# Altium PCB Spiritfarer.PcbDoc
Units mil, origin at the board's own origin, x right, y up, seen from the top; angles counter-clockwise.
Board outline 3370.39 x 2125.39 mil, 2 copper layers (Top Layer, Bottom Layer); 16 components, 0 nets, 0 pads, 1 vias.
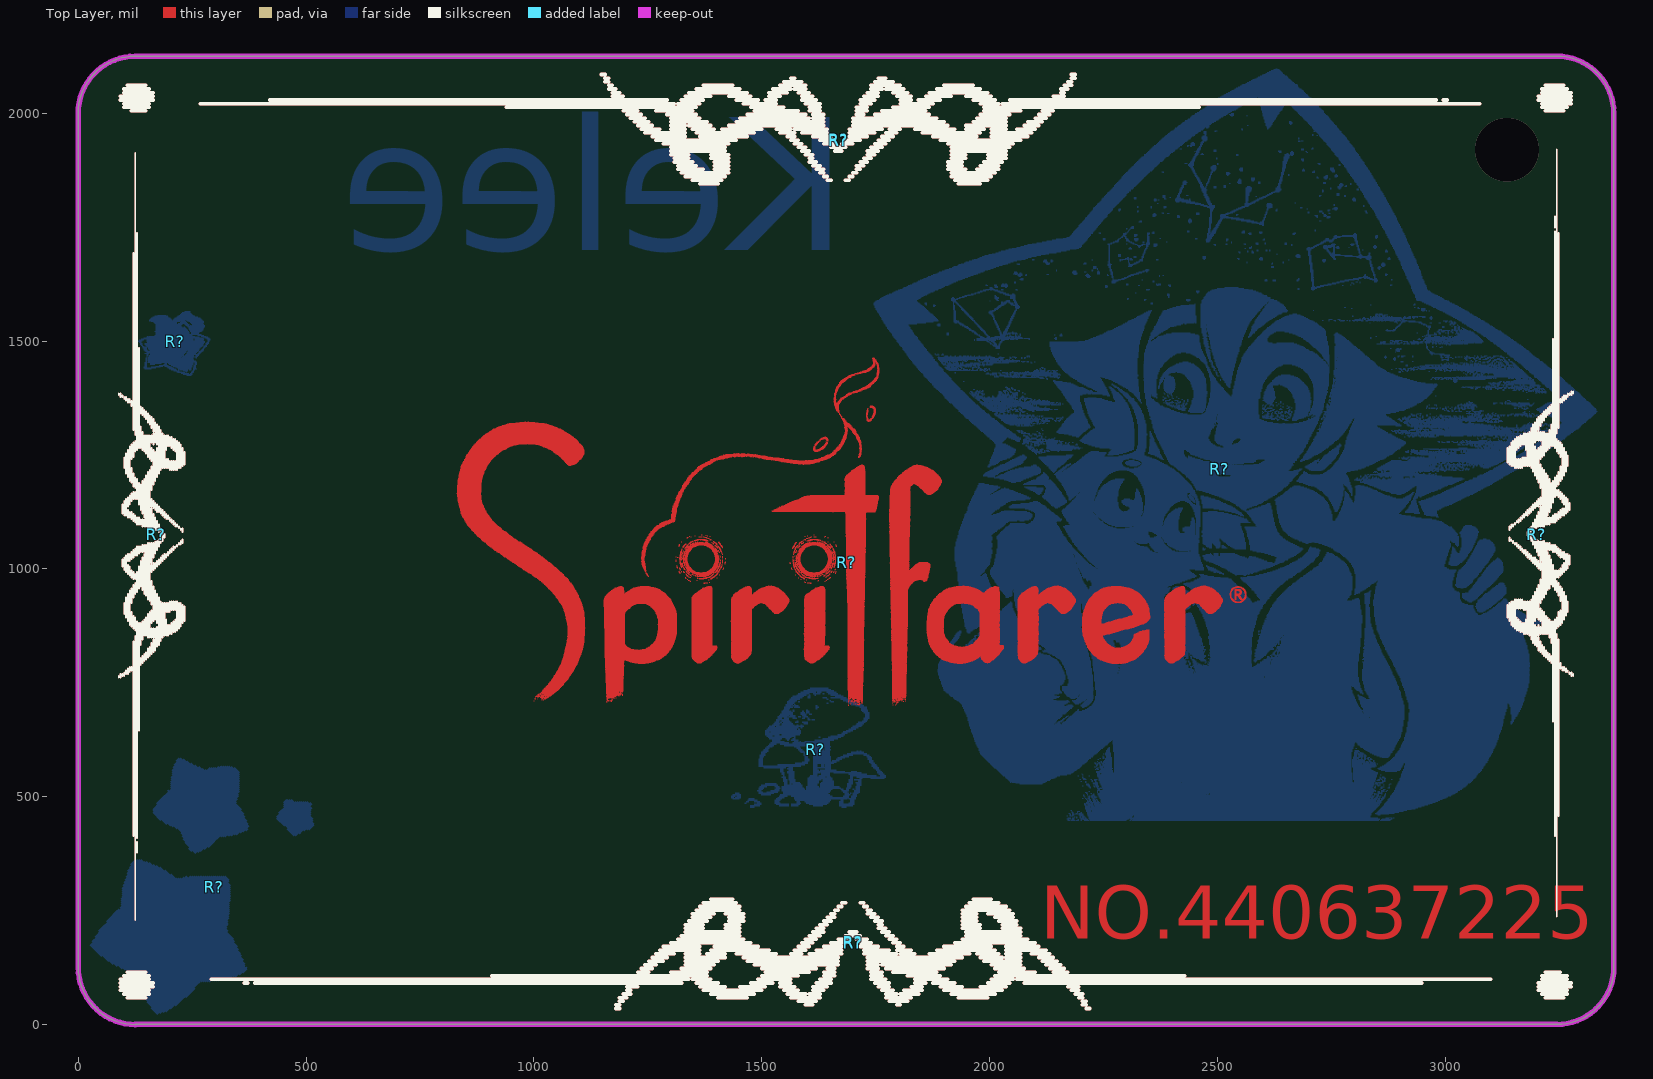
[diagram p0: Top Layer view]
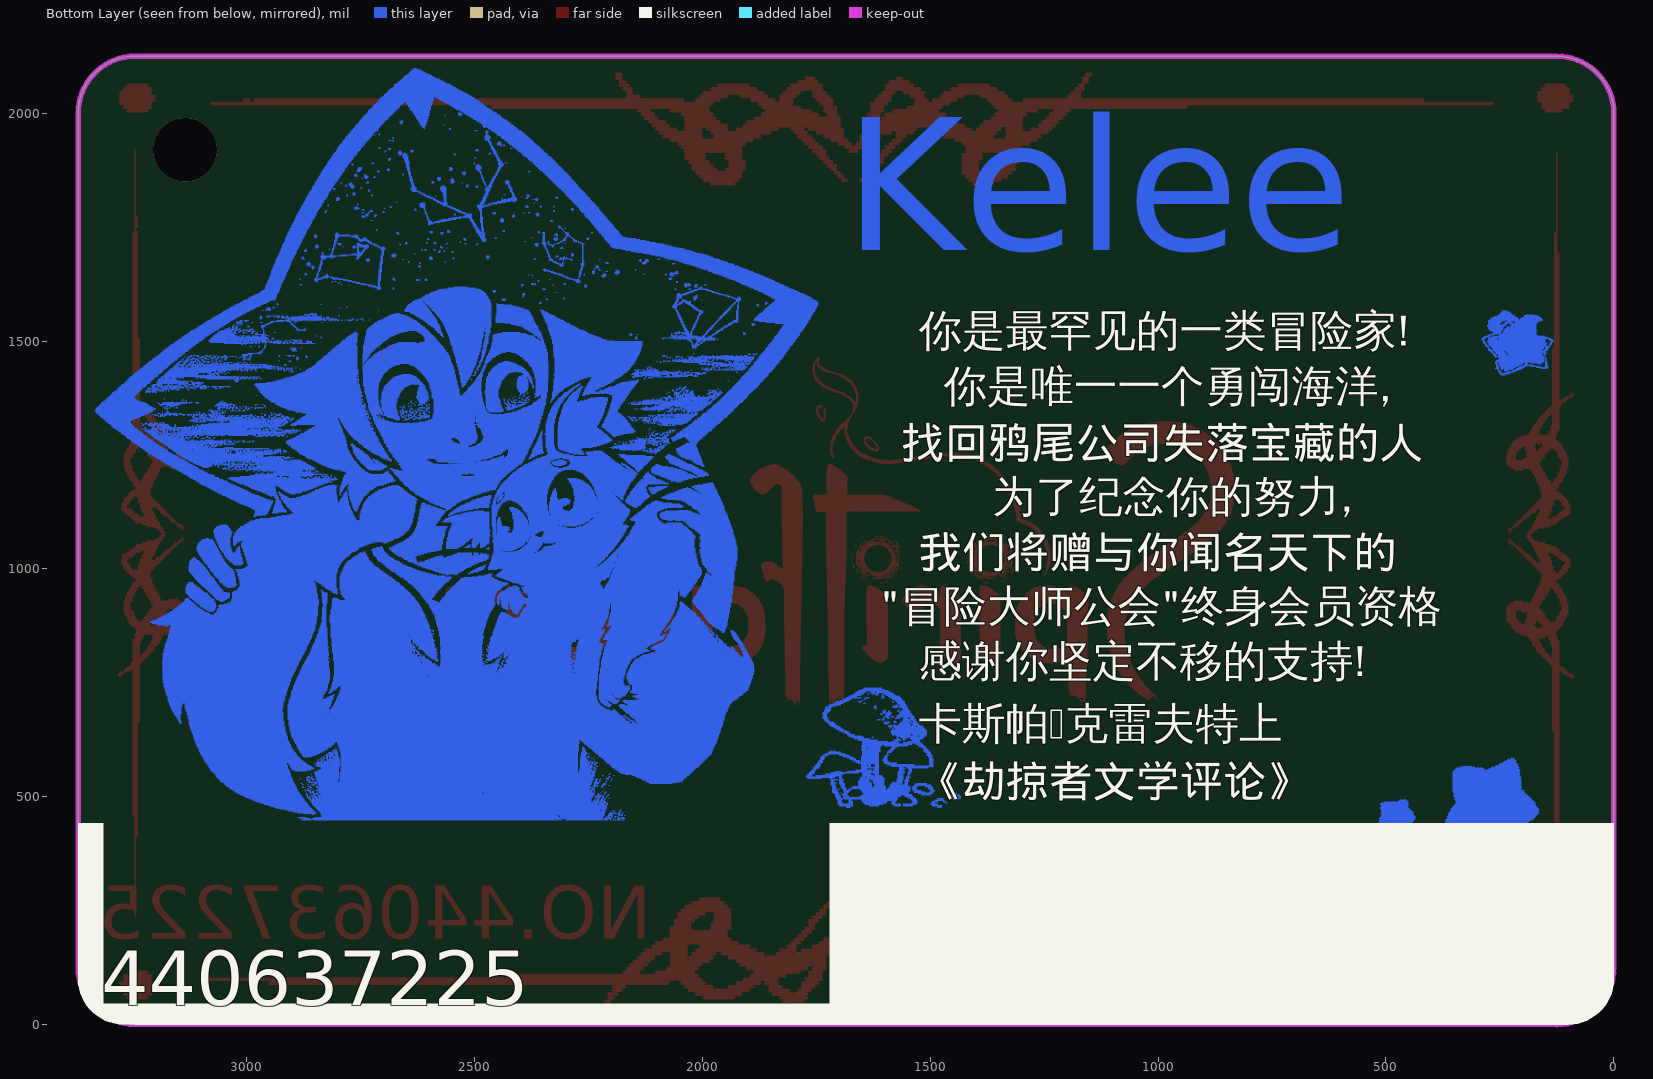
[diagram p1: Bottom Layer view, seen from below]

## Layer stack, top to bottom
Top Solder: solder mask 0.4, Solder Resist, Dk 3.5
Top Layer: signal copper 1.4
Dielectric 1: dielectric 12.6, FR-4, Dk 4.8
Bottom Layer: signal copper 1.4
Bottom Solder: solder mask 0.4, Solder Resist, Dk 3.5

## Board outline
0,125 0,2000 -0.2,1999.8 cw(c125,1999.8) 125,2125 3245,2125 3244.8,2125.2 cw(c3244.8,2000) 3370,2000 3370,125 3370.2,125.2 cw(c3245,125.2) 3245,0 125.2,0 125.2,-0.2 cw(c125.2,125)

## Design rules (kind name [scope] priority, off if disabled: settings)
AssemblyTestPointUsage [All] p1 off:
AssemblyTestpoint [All] p1 off: testpointundercomponent=TRUE minsize=40 maxsize=100 preferedsize=60 minholesize=0 maxholesize=40 preferedholesize=32 testpointgrid=1 usegrid=TRUE gridtolerance=0.01 allowsidetop=TRUE allowsidebottom=TRUE
Clearance [All] p1 off: gap=10 ignorepadtopadclearanceinfootprint=FALSE except(0: Arc-Hole Track-Hole SMDPad-Hole THPad-Hole Via-Hole Fill-Hole Poly-Hole Region-Hole Text-Hole)
ComponentClearance [All] p1 off: gap=10 collisioncheckmode=3 verticalgap=10 showdistances=FALSE
DiffPairsRouting [All] p1 off: maxlimit=10 minlimit=10 mostfreqgap=10 toplayer_minwidth=15 toplayer_maxwidth=15 toplayer_prefwidth=15 bottomlayer_minwidth=15 bottomlayer_maxwidth=15 bottomlayer_prefwidth=15 maxuncoupledlength=500
FabricationTestPointUsage [All] p1 off: valid=0 allowmultiple=FALSE
FabricationTestpoint [All] p1 off: side=3 testpointundercomponent=TRUE minsize=40 maxsize=100 preferedsize=60 minholesize=0 maxholesize=40 preferedholesize=32 testpointgrid=1 allowsidetop=TRUE allowsidebottom=TRUE usegrid=TRUE gridtolerance=0.01
FanoutControl Fanout_BGA [IsBGA] p1 off: bgadir=Out bgaviamode=Centered fanoutstyle=Auto fanoutdirection=Alternating viagrid=1 // Fanout_BGA (Default Rule)
FanoutControl Fanout_LCC [IsLCC] p2 off: bgadir=Out bgaviamode=Centered fanoutstyle=Auto fanoutdirection=Alternating viagrid=1 // Fanout_LCC (Default Rule)
FanoutControl Fanout_SOIC [IsSOIC] p3 off: bgadir=Out bgaviamode=Centered fanoutstyle=Auto fanoutdirection=Alternating viagrid=1 // Fanout_SOIC (Default Rule)
FanoutControl Fanout_Small [(CompPinCount < 5)] p4 off: bgadir=Out bgaviamode=Centered fanoutstyle=Auto fanoutdirection=OutThenIn viagrid=1 // Fanout_Small (Default Rule)
FanoutControl Fanout_Default [All] p5 off: bgadir=Out bgaviamode=Centered fanoutstyle=Auto fanoutdirection=Alternating viagrid=1 // Fanout_Default (Default Rule)
Height [All] p1 off: minheight=0 maxheight=1000 prefheight=500
HoleSize [All] p1 off: absolutevalues=TRUE maxlimit=100 minlimit=1 maxpercent=80.000 minpercent=20.000
HoleToHoleClearance [All] p1 off: gap=10 allowstackedmicrovias=TRUE
LayerPairs [All] p1 off: enforce=TRUE
MinimumSolderMaskSliver [All] p1 off: minsoldermaskwidth=10
NetAntennae [All] p1 off: netantennaetolerance=0
PasteMaskExpansion [All] p1 off: expansion=0
PlaneClearance [All] p1 off: clearance=20
PlaneConnect [All] p1 off: planeconnectstyle=Relief reliefexpansion=20 reliefentries=4 reliefconductorwidth=10 reliefairgap=10
PolygonConnect [All] p1 off: connectstyle=Relief reliefconductorwidth=10 reliefentries=4 polygonreliefangle="90 Angle" airgapwidth=10
RoutingCorners [All] p1 off: cornerstyle=45-Degree minsetback=100 maxsetback=100
RoutingLayers [All] p1 off: top layer_v5=TRUE bottom layer_v5=TRUE
RoutingPriority [All] p1 off: routingpriority=0
RoutingTopology [All] p1 off: topology=Shortest
RoutingVias [All] p1 off: holewidth=28 width=50 viastyle="Through Hole" minholewidth=28 minwidth=50 maxholewidth=28 maxwidth=50
ShortCircuit [All] p1 off: allowed=FALSE
SilkToSilkClearance [All] p1 off: silktosilkclearance=10
SilkToSolderMaskClearance [IsPad] p1 off: minsilkscreentomaskgap=10 clearancetoexposedcopper=TRUE
SolderMaskExpansion [All] p1 off: expansion=4 istentingtop=FALSE
UnRoutedNet [All] p1 off:
UnpouredPolygon [All] p1 off:
Width [All] p1 off: maxlimit=10 minlimit=10 preferedwidth=10
1 further rules are at their usual default settings.

## Components (designator, comment, footprint, x,y, rotation, side; value= is the part's Value field where it differs from the comment)
R? "Comment" Mushroom_BL 1617,603 r0 top
R? "Comment" STARS_BS 297,301 r0 top
R? "Comment" STARS_BL 297,301 r0 top
R? "Comment" Witchhat_BL 212,1498 r0 top
R? "Comment" "profile photo_BS" 2504,1219 r0 top
R? "Comment" "profile photo_BL" 2504,1219 r0 top
R? "Comment" pattern1_TL 3200,1075 r270 top
R? "Comment" pattern1_TL 170,1075 r90 top
R? "Comment" pattern1_TO 3200,1075 r270 top
R? "Comment" pattern1_TO 170,1075 r90 top
R? "Comment" Spiritfarer_LOGO_TS 1686,1013 r0 top
R? "Comment" Spiritfarer_LOGO_TL 1686,1013 r0 top
R? "Comment" pattern0_TL 1700,178 r180 top
R? "Comment" pattern0_TL 1668,1942 r0 top
R? "Comment" pattern0_TO 1668,1940 r0 top
R? "Comment" pattern0_TO 1700,180 r180 top

## Footprints (in the part's own frame and the unit in brackets; to place one, negate y for a bottom-side part, rotate by r counter-clockwise, add the part's x,y. Pads: shape width x height; smd on the part's side, far side on the other; paste and mask are expansions set on the pad)
Mushroom_BL [mil]
  Bottom Layer lines w3: -184,-105 -178,-105 ; -184,-102 -175,-102 ; -181,-108 -166,-108 ; -181,-99 -163,-99 ; -175,-105 -163,-105 ; -175,-96 -166,-96 ; -172,-102 -163,-102 ; -154,-117 -151,-117 ; -151,-114 -145,-114 ; -148,-111 -127,-111 ; -145,-108 -133,-108 ; -142,-126 -133,-126 ; -142,-123 -121,-123 ; -133,-120 -118,-120 ; -133,-114 -121,-114 ; -127,-117 -118,-117 ; -127,-90 -118,-90 ; -124,-96 -91,-96 ; -124,-93 -115,-93 ; -124,-87 -115,-87 ; -124,-84 -112,-84 ; -124,-36 -31,-36 ; -124,-33 -115,-33 ; -124,-30 -115,-30 ; -124,-27 -115,-27 ; -124,-24 -115,-24 ; -124,-21 -115,-21 ; -121,-81 -106,-81 ; -121,-18 -115,-18 ; -121,-15 -112,-15 ; -121,-12 -109,-12 ; -118,-99 -97,-99 ; -118,-78 -82,-78 ; -118,-9 -109,-9 ; -118,-6 -106,-6 ; -115,-3 -103,-3 ; -112,-39 -64,-39 ; -112,0 -103,0 ; -109,-75 -85,-75 ; -109,3 -100,3 ; -109,33 -79,33 ; -109,36 -31,36 ; -109,39 -100,39 ; -109,42 -31,42 ; -106,-93 -82,-93 ; -106,6 -94,6 ; -106,30 -94,30 ; -106,45 -40,45 ; -103,9 -91,9 ; -103,27 -52,27 ; -103,48 -37,48 ; -100,12 -85,12 ; -100,24 -73,24 ; -100,51 -88,51 ; -97,-90 -79,-90 ; -97,15 -58,15 ; -97,39 -31,39 ; -94,18 -67,18 ; -94,21 -76,21 ; -94,54 -79,54 ; -91,57 -76,57 ; -88,-117 -76,-117 ; -88,-114 -79,-114 ; -88,-111 -76,-111 ; -88,-87 -79,-87 ; -88,-81 -79,-81 ; -88,30 -43,30 ; -88,60 -79,60 ; -85,-120 -58,-120 ; -85,-108 -73,-108 ; -85,-84 -76,-84 ; -85,51 -25,51 ; -85,63 -79,63 ; -85,66 -58,66 ; -82,-105 -67,-105 ; -82,-33 -22,-33 ; -82,69 -73,69 ; -82,72 -61,72 ; -79,-123 -58,-123 ; -79,-102 -61,-102 ; -79,75 -58,75 ; -76,-99 32,-99 ; -76,-48 -70,-48 ; -76,-45 -70,-45 ; -76,-42 -70,-42 ; -76,12 32,12 ; -76,60 -73,60 ; -76,78 -49,78 ; -73,-90 35,-90 ; -73,-87 -22,-87 ; -73,-84 -25,-84 ; -73,-81 -28,-81 ; -73,-60 -64,-60 ; -73,-54 -67,-54 ; -73,-51 -67,-51 ; -73,33 -34,33 ; -73,54 -46,54 ; -73,57 -49,57 ; -73,63 -55,63 ; -73,81 -49,81 ; -73,84 -52,84 ; -70,-96 29,-96 ; -70,-93 32,-93 ; -70,-69 -61,-69 ; -70,-66 -61,-66 ; -70,-63 -64,-63 ; -70,-57 -67,-57 ; -70,60 -52,60 ; -70,87 -58,87 ; -67,-78 -28,-78 ; -67,-75 -61,-75 ; -67,-72 -61,-72 ; -67,9 -16,9 ; -67,69 -58,69 ; -67,90 -55,90 ; -67,93 -49,93 ; -64,24 -55,24 ; -64,96 -52,96 ; -64,99 -49,99 ; -61,-51 -46,-51 ; -61,-48 -46,-48 ; -61,-42 -49,-42 ; -61,21 -58,21 ; -61,102 -46,102 ; -61,105 -43,105 ; -58,-66 -43,-66 ; -58,-63 -46,-63 ; -58,-60 -46,-60 ; -58,-57 -46,-57 ; -58,-54 -46,-54 ; -58,-45 -49,-45 ; -58,-39 -49,-39 ; -58,72 -43,72 ; -58,108 -40,108 ; -55,-75 -52,-75 ; -55,-72 -34,-72 ; -55,-69 -43,-69 ; -55,75 -43,75 ; -55,111 -34,111 ; -52,-123 -37,-123 ; -52,-120 -34,-120 ; -52,-102 38,-102 ; -52,21 -37,21 ; -52,114 -28,114 ; -49,-75 -31,-75 ; -49,15 32,15 ; -49,24 -43,24 ; -49,69 -40,69 ; -49,84 -46,84 ; -49,87 -46,87 ; -49,96 -46,96 ; -49,117 -25,117 ; -46,-108 71,-108 ; -46,-105 74,-105 ; -46,6 -34,6 ; -46,18 -37,18 ; -46,27 -43,27 ; -46,93 -34,93 ; -46,99 -43,99 ; -43,-111 35,-111 ; -43,-30 -16,-30 ; -43,60 -37,60 ; -43,96 -37,96 ; -40,-117 -31,-117 ; -40,-114 -34,-114 ; -40,3 -31,3 ; -40,54 -37,54 ; -40,63 -37,63 ; -40,120 -19,120 ; -37,0 -28,0 ; -37,45 -34,45 ; -37,72 -31,72 ; -37,105 -34,105 ; -37,123 -13,123 ; -34,-3 -25,-3 ; -34,18 -31,18 ; -31,-6 -22,-6 ; -31,48 -28,48 ; -31,54 -28,54 ; -31,78 -19,78 ; -31,81 -22,81 ; -31,126 2,126 ; -28,-27 -16,-27 ; -28,60 -16,60 ; -28,69 -22,69 ; -28,75 -19,75 ; -28,84 -25,84 ; -25,-12 -19,-12 ; -25,-9 -22,-9 ; -25,57 -16,57 ; -25,72 -16,72 ; -25,129 41,129 ; -22,-114 32,-114 ; -22,-24 -13,-24 ; -22,-21 -13,-21 ; -22,-18 -16,-18 ; -22,-15 -16,-15 ; -22,18 32,18 ; -19,-117 29,-117 ; -19,-87 38,-87 ; -19,-84 56,-84 ; -19,-81 8,-81 ; -19,81 -13,81 ; -19,84 -13,84 ; -19,87 -16,87 ; -16,-78 5,-78 ; -16,-75 5,-75 ; -16,-72 8,-72 ; -16,-69 8,-69 ; -16,-66 14,-66 ; -16,-63 38,-63 ; -16,66 -10,66 ; -16,69 -13,69 ; -16,114 -10,114 ; -16,117 -10,117 ; -16,132 35,132 ; -13,-120 26,-120 ; -13,-60 23,-60 ; -13,78 -7,78 ; -13,120 -10,120 ; -10,-57 5,-57 ; -10,9 32,9 ; -10,135 29,135 ; -7,-3 32,-3 ; -7,0 20,0 ; -7,3 20,3 ; -7,6 35,6 ; -7,66 -1,66 ; -4,-123 17,-123 ; -4,-54 5,-54 ; -4,-51 11,-51 ; -4,-48 65,-48 ; -4,-45 8,-45 ; -4,-42 5,-42 ; -4,-39 35,-39 ; -4,-36 5,-36 ; -4,-33 5,-33 ; -4,-30 41,-30 ; -4,-27 47,-27 ; -4,-24 35,-24 ; -4,-21 35,-21 ; -4,-18 35,-18 ; -4,-15 35,-15 ; -4,-12 32,-12 ; -4,-9 32,-9 ; -4,-6 32,-6 ; -4,123 11,123 ; -1,21 41,21 ; -1,120 2,120 ; 2,90 5,90 ; 2,93 8,93 ; 2,96 5,96 ; 5,126 14,126 ; 8,-57 32,-57 ; 8,27 11,27 ; 11,-81 53,-81 ; 11,-78 41,-78 ; 11,-75 41,-75 ; 11,-45 47,-45 ; 14,-72 41,-72 ; 14,-54 32,-54 ; 14,-51 32,-51 ; 14,-36 20,-36 ; 14,-33 20,-33 ; 17,-69 41,-69 ; 17,-66 38,-66 ; 17,24 50,24 ; 17,114 26,114 ; 17,123 20,123 ; 23,-42 35,-42 ; 23,-36 35,-36 ; 23,-33 35,-33 ; 23,0 35,0 ; 23,3 32,3 ; 26,-60 35,-60 ; 26,102 29,102 ; 26,111 29,111 ; 26,126 47,126 ; 29,27 56,27 ; 29,123 50,123 ; 32,108 35,108 ; 35,30 62,30 ; 35,105 41,105 ; 35,114 68,114 ; 35,120 56,120 ; 38,-24 53,-24 ; 41,-51 101,-51 ; 44,117 62,117 ; 47,-21 59,-21 ; 50,-18 65,-18 ; 50,33 65,33 ; 53,-123 83,-123 ; 53,-120 86,-120 ; 53,-117 62,-117 ; 53,-114 62,-114 ; 56,-111 62,-111 ; 56,-87 62,-87 ; 56,-15 74,-15 ; 56,111 74,111 ; 59,-126 68,-126 ; 59,-90 74,-90 ; 59,36 71,36 ; 62,-102 74,-102 ; 62,-93 71,-93 ; 62,-12 83,-12 ; 62,39 77,39 ; 62,108 80,108 ; 65,-99 77,-99 ; 65,-96 74,-96 ; 68,-87 74,-87 ; 68,-84 77,-84 ; 68,42 83,42 ; 68,105 89,105 ; 71,-81 80,-81 ; 71,-78 80,-78 ; 71,-75 83,-75 ; 71,-9 113,-9 ; 74,-117 86,-117 ; 74,-108 89,-108 ; 74,-72 83,-72 ; 74,-69 83,-69 ; 74,-66 83,-66 ; 74,-54 113,-54 ; 74,45 89,45 ; 74,102 95,102 ; 77,-114 86,-114 ; 77,-111 86,-111 ; 77,-96 80,-96 ; 77,-63 83,-63 ; 77,-60 83,-60 ; 77,-57 134,-57 ; 80,-105 89,-105 ; 80,-102 92,-102 ; 80,-48 92,-48 ; 80,-6 107,-6 ; 80,48 95,48 ; 80,99 104,99 ; 83,-99 92,-99 ; 83,-96 95,-96 ; 83,-87 86,-87 ; 83,51 101,51 ; 86,-93 98,-93 ; 86,-90 98,-90 ; 86,-66 101,-66 ; 89,-87 98,-87 ; 89,-84 98,-84 ; 89,-81 98,-81 ; 89,-72 101,-72 ; 89,54 104,54 ; 89,96 107,96 ; 92,-78 101,-78 ; 92,-75 101,-75 ; 92,-60 155,-60 ; 92,-3 95,-3 ; 92,57 107,57 ; 95,-69 101,-69 ; 95,60 110,60 ; 98,-63 104,-63 ; 98,-3 101,-3 ; 98,93 113,93 ; 101,87 116,87 ; 101,90 113,90 ; 104,63 113,63 ; 104,84 116,84 ; 107,-12 119,-12 ; 107,66 116,66 ; 107,69 119,69 ; 107,81 119,81 ; 110,72 119,72 ; 110,75 119,75 ; 110,78 119,78 ; 113,-15 122,-15 ; 116,-21 125,-21 ; 116,-18 125,-18 ; 119,-27 128,-27 ; 119,-24 128,-24 ; 122,-63 152,-63 ; 122,-30 131,-30 ; 125,-36 137,-36 ; 125,-33 134,-33 ; 128,-39 140,-39 ; 131,-42 140,-42 ; 134,-45 143,-45 ; 137,-51 149,-51 ; 137,-48 146,-48 ; 140,-54 152,-54 ; 143,-57 155,-57
pattern0_TL [mil]
  Top Layer lines w8: 1608,103 1544,103 ; 1608,95 1536,95 ; 1608,87 1536,87 ; 1608,79 1544,79 ; 1600,111 1544,111 ; 1600,71 1544,71 ; 1592,119 1552,119 ; 1592,63 1552,63 ; 1408,79 360,79 ; 1336,87 1328,87 ; 1312,87 376,87 ; 792,71 320,71 ; 520,143 512,143 ; 520,135 512,135 ; 512,127 504,127 ; 512,119 496,119 ; 504,111 488,111 ; 496,103 488,103 ; 496,95 472,95 ; 472,63 448,63 ; 464,55 440,55 ; 456,47 432,47 ; 448,39 416,39 ; 440,31 408,31 ; 432,23 392,23 ; 424,15 336,15 ; 416,7 336,7 ; 400,63 320,63 ; 400,-1 224,-1 ; 384,-9 240,-9 ; 376,55 312,55 ; 376,-17 248,-17 ; 368,47 304,47 ; 368,39 296,39 ; 368,31 280,31 ; 368,23 336,23 ; 368,-25 248,-25 ; 368,-33 328,-33 ; 368,-41 328,-41 ; 360,-49 320,-49 ; 352,79 312,79 ; 352,-57 312,-57 ; 352,-65 304,-65 ; 344,87 296,87 ; 344,-73 248,-73 ; 336,95 280,95 ; 336,-81 248,-81 ; 328,103 200,103 ; 328,-89 256,-89 ; 320,23 280,23 ; 312,111 216,111 ; 312,15 184,15 ; 312,-97 264,-97 ; 304,7 208,7 ; 296,119 232,119 ; 280,-33 248,-33 ; 280,-41 248,-41 ; 280,-65 240,-65 ; 272,-49 240,-49 ; 272,-57 240,-57 ; 256,23 168,23 ; 248,95 192,95 ; 240,31 32,31 ; 232,39 32,39 ; 224,87 176,87 ; 216,47 32,47 ; 208,79 136,79 ; 200,71 120,71 ; 200,55 80,55 ; 192,63 96,63 ; 160,95 128,95 ; 160,87 136,87 ; 152,103 120,103 ; 144,111 104,111 ; 136,119 72,119 ; 136,23 112,23 ; 128,15 104,15 ; 120,127 80,127 ; 120,7 96,7 ; 112,-1 88,-1 ; 104,135 88,135 ; 104,-9 80,-9 ; 96,111 72,111 ; 96,23 24,23 ; 96,-17 72,-17 ; 88,103 64,103 ; 88,95 56,95 ; 88,-25 64,-25 ; 80,87 48,87 ; 80,15 24,15 ; 80,-33 64,-33 ; 72,79 48,79 ; 72,-41 56,-41 ; 64,71 40,71 ; 64,63 40,63 ; 64,7 24,7 ; 64,-49 48,-49 ; 56,55 40,55 ; 56,-57 40,-57 ; 48,-1 16,-1 ; 48,-65 40,-65 ; 40,-73 32,-73 ; 32,-9 8,-9 ; 32,-81 24,-81 ; 24,-89 16,-89 ; 16,-17 -16,-17 ; 8,-25 -8,-25 ; -8,-9 -32,-9 ; -16,7 -56,7 ; -16,-1 -40,-1 ; -16,-89 -24,-89 ; -24,23 -96,23 ; -24,15 -80,15 ; -24,-81 -32,-81 ; -32,55 -56,55 ; -32,47 -56,47 ; -32,39 -224,39 ; -32,31 -240,31 ; -32,-65 -48,-65 ; -32,-73 -40,-73 ; -40,79 -72,79 ; -40,71 -64,71 ; -40,63 -64,63 ; -40,-57 -56,-57 ; -48,87 -80,87 ; -48,-49 -64,-49 ; -56,95 -80,95 ; -56,-33 -72,-33 ; -56,-41 -64,-41 ; -64,103 -88,103 ; -64,47 -216,47 ; -64,-25 -80,-25 ; -72,119 -128,119 ; -72,111 -96,111 ; -72,55 -200,55 ; -72,-17 -88,-17 ; -80,127 -120,127 ; -80,-9 -96,-9 ; -88,63 -184,63 ; -88,-1 -104,-1 ; -96,135 -104,135 ; -96,15 -128,15 ; -96,7 -112,7 ; -104,111 -144,111 ; -104,23 -136,23 ; -112,103 -152,103 ; -120,71 -192,71 ; -128,95 -152,95 ; -136,87 -160,87 ; -136,79 -208,79 ; -168,23 -256,23 ; -176,87 -224,87 ; -184,15 -312,15 ; -192,95 -240,95 ; -200,103 -328,103 ; -200,7 -304,7 ; -216,111 -312,111 ; -224,-1 -400,-1 ; -232,119 -296,119 ; -240,-9 -384,-9 ; -240,-33 -280,-33 ; -240,-41 -280,-41 ; -240,-49 -272,-49 ; -240,-57 -272,-57 ; -240,-65 -272,-65 ; -240,-73 -344,-73 ; -248,-17 -368,-17 ; -248,-25 -368,-25 ; -248,-81 -336,-81 ; -256,-89 -320,-89 ; -264,-97 -304,-97 ; -272,23 -320,23 ; -280,95 -336,95 ; -280,31 -328,31 ; -288,39 -368,39 ; -296,87 -344,87 ; -296,-65 -352,-65 ; -304,79 -352,79 ; -304,47 -368,47 ; -312,71 -728,71 ; -312,55 -376,55 ; -312,-57 -352,-57 ; -320,63 -400,63 ; -320,-49 -360,-49 ; -328,-33 -368,-33 ; -328,-41 -360,-41 ; -336,31 -368,31 ; -336,23 -368,23 ; -336,15 -424,15 ; -336,7 -408,7 ; -360,79 -1400,79 ; -376,87 -1248,87 ; -392,23 -432,23 ; -408,31 -440,31 ; -416,39 -448,39 ; -424,47 -456,47 ; -432,55 -464,55 ; -440,63 -472,63 ; -472,95 -496,95 ; -480,103 -496,103 ; -488,111 -504,111 ; -496,119 -504,119 ; -504,135 -512,135 ; -504,127 -512,127 ; -512,143 -520,143 ; -1504,103 -1568,103 ; -1504,95 -1576,95 ; -1504,87 -1576,87 ; -1512,111 -1568,111 ; -1512,79 -1568,79 ; -1512,71 -1568,71 ; -1520,119 -1560,119 ; -1520,63 -1552,63
pattern0_TO [mil]
  silkscreen extent -1576,-95 1608,145
pattern1_TL [mil]
  Top Layer lines w4: 182,-63 154,-63 ; -158,-63 -190,-63 ; 190,-59 150,-59 ; 14,-59 6,-59 ; -10,-59 -18,-59 ; -154,-59 -194,-59 ; 198,-55 146,-55 ; 14,-55 10,-55 ; -14,-55 -22,-55 ; -150,-55 -202,-55 ; 202,-51 146,-51 ; 18,-51 14,-51 ; -18,-51 -22,-51 ; -150,-51 -206,-51 ; 206,-47 142,-47 ; 22,-47 18,-47 ; -22,-47 -26,-47 ; -146,-47 -210,-47 ; 210,-43 182,-43 ; 162,-43 142,-43 ; 26,-43 18,-43 ; -26,-43 -30,-43 ; -146,-43 -166,-43 ; -186,-43 -214,-43 ; 210,-39 186,-39 ; 162,-39 142,-39 ; 30,-39 22,-39 ; -26,-39 -34,-39 ; -146,-39 -166,-39 ; -190,-39 -214,-39 ; 214,-35 190,-35 ; 162,-35 142,-35 ; 34,-35 26,-35 ; -30,-35 -38,-35 ; -146,-35 -166,-35 ; -194,-35 -218,-35 ; 214,-31 194,-31 ; 162,-31 142,-31 ; 38,-31 30,-31 ; -34,-31 -42,-31 ; -146,-31 -170,-31 ; -198,-31 -218,-31 ; 218,-27 194,-27 ; 166,-27 146,-27 ; 42,-27 34,-27 ; -38,-27 -46,-27 ; -150,-27 -170,-27 ; -198,-27 -222,-27 ; 218,-23 186,-23 ; 166,-23 146,-23 ; 46,-23 34,-23 ; -42,-23 -50,-23 ; -150,-23 -170,-23 ; -186,-23 -222,-23 ; 218,-19 146,-19 ; 50,-19 38,-19 ; 2,-19 -6,-19 ; -42,-19 -54,-19 ; -150,-19 -222,-19 ; 222,-15 146,-15 ; 54,-15 42,-15 ; 10,-15 -14,-15 ; -46,-15 -58,-15 ; -150,-15 -226,-15 ; 230,-11 142,-11 ; 58,-11 46,-11 ; 14,-11 2,-11 ; -6,-11 -18,-11 ; -50,-11 -62,-11 ; -146,-11 -234,-11 ; 238,-7 134,-7 ; 62,-7 50,-7 ; 22,-7 6,-7 ; -10,-7 -26,-7 ; -54,-7 -66,-7 ; -138,-7 -242,-7 ; 242,-3 198,-3 ; 190,-3 126,-3 ; 66,-3 50,-3 ; 30,-3 10,-3 ; -14,-3 -34,-3 ; -58,-3 -70,-3 ; -130,-3 -194,-3 ; -202,-3 -246,-3 ; 246,1 202,1 ; 182,1 118,1 ; 70,1 54,1 ; 38,1 10,1 ; -14,1 -42,1 ; -62,1 -74,1 ; -122,1 -186,1 ; -206,1 -254,1 ; 254,5 226,5 ; 222,5 198,5 ; 186,5 110,5 ; 74,5 58,5 ; 46,5 14,5 ; -18,5 -50,5 ; -62,5 -78,5 ; -114,5 -190,5 ; -206,5 -226,5 ; -230,5 -258,5 ; 258,9 234,9 ; 218,9 202,9 ; 190,9 162,9 ; 150,9 98,9 ; 78,9 62,9 ; 58,9 14,9 ; -18,9 -62,9 ; -66,9 -82,9 ; -102,9 -154,9 ; -166,9 -194,9 ; -206,9 -226,9 ; -238,9 -262,9 ; 262,13 242,13 ; 218,13 166,13 ; 142,13 14,13 ; -18,13 -146,13 ; -170,13 -226,13 ; -246,13 -266,13 ; 266,17 246,17 ; 218,17 170,17 ; 138,17 14,17 ; -18,17 -142,17 ; -174,17 -226,17 ; -250,17 -270,17 ; 270,21 254,21 ; 218,21 178,21 ; 130,21 18,21 ; -22,21 -134,21 ; -182,21 -222,21 ; -258,21 -274,21 ; 274,25 258,25 ; 218,25 182,25 ; 122,25 38,25 ; 34,25 18,25 ; -22,25 -38,25 ; -42,25 -130,25 ; -186,25 -222,25 ; -262,25 -278,25 ; 278,29 262,29 ; 226,29 186,29 ; 118,29 46,29 ; 34,29 18,29 ; -22,29 -38,29 ; -50,29 -122,29 ; -190,29 -230,29 ; -266,29 -282,29 ; 282,33 266,33 ; 238,33 190,33 ; 110,33 54,33 ; 34,33 22,33 ; -26,33 -38,33 ; -58,33 -114,33 ; -194,33 -242,33 ; -270,33 -286,33 ; 410,37 190,37 ; 114,37 66,37 ; 38,37 22,37 ; -26,37 -42,37 ; -70,37 -118,37 ; -194,37 -430,37 ; 662,41 186,41 ; 122,41 78,41 ; 38,41 22,41 ; -26,41 -46,41 ; -82,41 -126,41 ; -190,41 -666,41 ; -674,41 -698,41 ; 838,45 218,45 ; 206,45 182,45 ; 126,45 102,45 ; 94,45 78,45 ; 42,45 26,45 ; -30,45 -46,45 ; -86,45 -98,45 ; -106,45 -130,45 ; -182,45 -210,45 ; -222,45 -846,45 ; 618,49 230,49 ; 202,49 170,49 ; 134,49 106,49 ; 94,49 78,49 ; 46,49 30,49 ; -34,49 -50,49 ; -82,49 -98,49 ; -110,49 -138,49 ; -178,49 -206,49 ; -234,49 -662,49 ; 294,53 282,53 ; 198,53 166,53 ; 146,53 114,53 ; 90,53 74,53 ; 50,53 34,53 ; -38,53 -54,53 ; -78,53 -94,53 ; -118,53 -150,53 ; -170,53 -202,53 ; -290,53 -298,53 ; 298,57 290,57 ; 194,57 118,57 ; 86,57 66,57 ; 50,57 38,57 ; -42,57 -58,57 ; -70,57 -90,57 ; -122,57 -198,57 ; -290,57 -302,57 ; 298,61 290,61 ; 186,61 126,61 ; 82,61 62,61 ; 54,61 38,61 ; -42,61 -58,61 ; -66,61 -86,61 ; -130,61 -190,61 ; -294,61 -306,61 ; 302,65 294,65 ; 178,65 134,65 ; 78,65 42,65 ; -46,65 -82,65 ; -138,65 -182,65 ; -298,65 -306,65 ; 302,69 298,69 ; 170,69 146,69 ; 74,69 42,69 ; -50,69 -78,69 ; -150,69 -174,69 ; -302,69 -310,69 ; 306,73 302,73 ; 66,73 46,73 ; -54,73 -70,73 ; -306,73 -310,73 ; 310,77 302,77 ; -306,77 -314,77 ; 310,81 306,81 ; -310,81 -314,81
pattern1_TO [mil]
  silkscreen extent -846,-63 838,81
"profile photo_BL" [mil]
  Bottom Layer drawing of 9955 lines, arcs and shapes, not listed
"profile photo_BS" [mil]
Spiritfarer_LOGO_TL [mil]
  Top Layer drawing of 6418 lines, arcs and shapes, not listed
Spiritfarer_LOGO_TS [mil]
STARS_BL [mil]
  Bottom Layer lines w3: -270.56,-126.17 -245.1,-151.63 ; -268.44,-124.05 -230.26,-162.23 ; -266.32,-121.93 -219.65,-168.6 ; -266.32,-117.69 -211.16,-172.84 ; -264.2,-115.56 -200.56,-179.2 ; -262.07,-113.44 -194.19,-181.33 ; -259.95,-111.32 -185.71,-185.57 ; -259.95,-107.08 -179.34,-187.69 ; -257.83,-104.96 -96.61,-266.18 ; -255.71,-102.84 -92.37,-266.18 ; -253.59,-100.72 -90.25,-264.06 ; -251.47,-98.59 -88.13,-261.94 ; -251.47,-94.35 -86.01,-259.81 ; -249.35,-92.23 -81.76,-259.81 ; -247.23,-90.11 -79.64,-257.69 ; -245.1,-87.99 -77.52,-255.57 ; -242.98,-85.87 -75.4,-253.45 ; -240.86,-83.75 -73.28,-251.33 ; -238.74,-81.62 -71.16,-249.21 ; -236.62,-79.5 -69.03,-247.09 ; -234.5,-77.38 -66.91,-244.97 ; -234.5,-73.14 -64.79,-242.84 ; -232.38,-71.02 -62.67,-240.72 ; -230.25,-68.9 -58.43,-240.72 ; -228.13,-66.77 -56.31,-238.6 ; -226.01,-64.65 -54.19,-236.48 ; -223.89,-62.53 -52.06,-234.36 ; -221.77,-60.41 -49.94,-232.24 ; -219.65,-58.29 -47.82,-230.12 ; -217.53,-56.17 -45.7,-227.99 ; -215.41,-54.05 -43.58,-225.87 ; -213.28,-51.93 -41.46,-223.75 ; -211.16,-49.8 -41.46,-219.51 ; -209.04,-47.68 -39.34,-217.39 ; -204.8,-47.68 -37.21,-215.27 ; -204.8,-43.44 -35.09,-213.15 ; -202.68,-41.32 -32.97,-211.02 ; -202.68,-37.08 -30.85,-208.9 ; -202.68,-32.83 -28.73,-206.78 ; -202.68,-28.59 -24.49,-206.78 ; -202.68,-24.35 -20.24,-206.78 ; -200.56,-22.23 -16,-206.78 ; -200.56,-17.98 -11.76,-206.78 ; -200.56,-13.74 -7.52,-206.78 ; -200.56,-9.5 -5.39,-204.66 ; -200.56,-5.26 -1.15,-204.66 ; -200.56,-1.01 3.09,-204.66 ; -198.44,1.11 7.33,-204.66 ; -198.44,5.35 11.58,-204.66 ; -196.31,7.47 13.7,-202.54 ; -196.31,11.71 17.94,-202.54 ; -194.19,13.84 22.18,-202.54 ; -194.19,18.08 24.3,-200.42 ; -192.07,20.2 28.55,-200.42 ; -192.07,24.44 32.79,-200.42 ; -189.95,26.56 34.91,-198.3 ; -189.95,30.81 39.15,-198.3 ; -187.83,32.93 41.27,-196.18 ; -187.83,37.17 45.52,-196.18 ; -185.71,39.29 49.76,-196.18 ; -183.59,41.41 51.88,-194.05 ; -183.59,45.66 54,-191.93 ; -181.46,47.78 58.24,-191.93 ; -181.46,52.02 60.37,-189.81 ; -179.34,54.14 62.49,-187.69 ; -177.22,56.26 66.73,-187.69 ; -175.1,58.38 68.85,-185.57 ; -172.98,-194.05 -98.73,-268.3 ; -172.98,60.5 70.97,-183.45 ; -170.86,-200.42 -100.85,-270.42 ; -168.74,-206.78 -102.98,-272.54 ; -168.74,60.5 73.09,-181.33 ; -166.62,-213.15 -107.22,-272.54 ; -164.49,60.5 68.85,-172.84 ; -162.37,-221.63 -109.34,-274.66 ; -160.25,60.5 68.85,-168.6 ; -156.01,-232.24 -113.58,-274.66 ; -151.77,-240.72 -115.7,-276.79 ; -151.77,56.26 64.61,-160.11 ; -147.52,56.26 60.37,-151.63 ; -145.4,-251.33 -119.95,-276.79 ; -141.16,54.14 58.24,-145.26 ; -136.92,-264.06 -122.07,-278.91 ; -132.67,49.9 54,-136.78 ; -132.67,164.45 -115.7,147.48 ; -132.67,168.69 -102.98,138.99 ; -132.67,172.93 -94.49,134.75 ; -130.55,175.06 -88.13,132.63 ; -128.43,177.18 -79.64,128.39 ; -126.31,47.78 51.88,-130.41 ; -126.31,179.3 -26.61,79.6 ; -124.19,181.42 -24.49,81.72 ; -124.19,185.66 -22.37,83.84 ; -122.07,187.78 -18.12,83.84 ; -119.95,189.91 -16,85.96 ; -117.83,43.53 45.52,-119.81 ; -117.82,192.03 -13.88,88.08 ; -115.7,194.15 -9.64,88.08 ; -113.58,196.27 -7.52,90.2 ; -111.46,198.39 -5.4,92.32 ; -109.34,200.51 -3.27,94.45 ; -107.22,37.17 43.4,-113.44 ; -107.22,202.63 -1.15,96.57 ; -105.1,204.75 0.97,98.69 ; -102.98,206.88 3.09,100.81 ; -100.85,209 5.21,102.93 ; -100.85,213.24 7.33,105.05 ; -96.61,213.24 9.45,107.17 ; -94.49,28.68 30.67,-96.47 ; -94.49,215.36 11.58,109.3 ; -94.49,219.6 13.7,111.42 ; -94.49,223.85 17.94,111.42 ; -94.49,228.09 22.18,111.42 ; -94.49,232.33 26.42,111.42 ; -92.37,234.45 28.55,113.54 ; -92.37,238.7 32.79,113.54 ; -92.37,242.94 37.03,113.54 ; -90.25,245.06 41.27,113.54 ; -90.25,249.3 43.4,115.66 ; -90.25,253.54 47.64,115.66 ; -90.25,257.79 51.88,115.66 ; -88.13,259.91 54,117.78 ; -88.13,264.15 56.12,119.9 ; -86.01,266.27 60.37,119.9 ; -86.01,270.52 62.49,122.02 ; -83.88,272.64 66.73,122.02 ; -81.76,20.2 28.55,-90.11 ; -81.76,274.76 68.85,124.14 ; -81.76,279 73.09,124.14 ; -79.64,281.12 75.22,126.27 ; -77.52,20.2 28.55,-85.87 ; -77.52,283.24 75.22,130.51 ; -73.28,20.2 30.67,-83.75 ; -73.28,283.24 77.34,132.63 ; -71.16,119.9 -30.85,79.6 ; -69.03,20.2 30.67,-79.5 ; -69.03,113.54 -32.97,77.48 ; -66.91,22.32 30.67,-75.26 ; -66.91,107.17 -37.21,77.48 ; -66.91,281.12 75.22,138.99 ; -62.67,22.32 30.67,-71.02 ; -62.67,98.69 -39.34,75.35 ; -60.55,24.44 32.79,-68.9 ; -58.43,276.88 73.09,145.36 ; -54.19,22.32 32.79,-64.65 ; -54.19,85.96 -47.82,79.6 ; -52.06,24.44 32.79,-60.41 ; -49.94,272.64 68.85,153.84 ; -47.82,24.44 34.91,-58.29 ; -43.58,24.44 34.91,-54.05 ; -41.46,268.39 66.73,160.21 ; -39.34,24.44 34.91,-49.8 ; -35.09,24.44 34.91,-45.56 ; -32.97,264.15 60.37,170.81 ; -30.85,24.44 34.91,-41.32 ; -26.61,24.44 34.91,-37.08 ; -24.49,259.91 49.76,185.66 ; -22.37,24.44 34.91,-32.83 ; -18.12,24.44 37.03,-30.71 ; -18.12,257.79 49.76,189.91 ; -13.88,24.44 37.03,-26.47 ; -13.88,257.79 51.88,192.03 ; -11.76,259.91 51.88,196.27 ; -9.64,24.44 37.03,-22.23 ; -9.64,262.03 54,198.39 ; -5.4,24.44 37.03,-17.98 ; -5.39,262.03 54,202.63 ; -1.15,24.44 37.03,-13.74 ; -1.15,262.03 54,206.88 ; 3.09,24.44 37.03,-9.5 ; 3.09,262.03 56.12,209 ; 7.33,24.44 37.03,-5.26 ; 7.33,262.03 56.12,213.24 ; 9.45,264.15 56.12,217.48 ; 11.58,24.44 37.03,-1.01 ; 13.7,264.15 56.12,221.72 ; 15.82,24.44 37.03,3.23 ; 15.82,266.27 56.12,225.97 ; 20.06,24.44 32.79,11.71 ; 20.06,266.27 56.12,230.21 ; 24.3,24.44 32.79,15.96 ; 24.3,266.27 56.12,234.45 ; 28.55,266.27 56.12,238.7 ; 32.79,266.27 56.12,242.94 ; 39.15,264.15 56.12,247.18 ; 45.52,262.03 56.12,251.42 ; 70.97,-174.96 73.09,-177.08 ; 138.85,151.72 155.83,134.75 ; 138.85,155.96 181.28,113.54 ; 140.98,158.09 183.4,115.66 ; 143.1,160.21 185.52,117.78 ; 143.1,164.45 189.77,117.78 ; 145.22,166.57 191.89,119.9 ; 147.34,168.69 194.01,122.02 ; 149.46,170.81 196.13,124.14 ; 151.58,172.93 200.37,124.14 ; 153.7,175.06 202.49,126.27 ; 153.7,179.3 206.74,126.27 ; 153.7,183.54 210.98,126.27 ; 153.7,187.78 213.1,128.39 ; 155.83,189.91 215.22,130.51 ; 157.95,192.03 217.34,132.63 ; 162.19,128.39 177.04,113.54 ; 162.19,192.03 219.46,134.75 ; 166.43,192.03 219.46,138.99 ; 170.67,192.03 217.34,145.36 ; 179.16,187.78 217.34,149.6 ; 183.4,187.78 213.1,158.09 ; 187.65,187.78 213.1,162.33 ; 191.89,187.78 213.1,166.57 ; 196.13,187.78 213.1,170.81 ; 200.37,187.78 215.22,172.93 ; 204.62,187.78 213.1,179.3 ; 210.98,185.66 215.22,181.42
STARS_BS [mil]
Witchhat_BL [mil]
  Bottom Layer lines w2: -80,1 -74,1 ; -80,3 -72,3 ; -78,-1 -74,-1 ; -78,5 -68,5 ; -76,-5 -72,-5 ; -76,-3 -72,-3 ; -74,-7 -70,-7 ; -74,7 40,7 ; -72,-9 -68,-9 ; -70,-13 -62,-13 ; -70,-11 -62,-11 ; -68,-57 -42,-57 ; -68,-55 -62,-55 ; -68,-17 -60,-17 ; -68,-15 -62,-15 ; -68,9 62,9 ; -66,-59 -52,-59 ; -66,-53 -62,-53 ; -66,-51 -62,-51 ; -66,-49 -62,-49 ; -66,-47 -62,-47 ; -66,-45 -60,-45 ; -66,-25 -56,-25 ; -66,-19 -58,-19 ; -66,-5 62,-5 ; -66,-3 64,-3 ; -64,-43 -62,-43 ; -64,-41 -60,-41 ; -64,-39 -60,-39 ; -64,-37 -60,-37 ; -64,-35 -60,-35 ; -64,-21 24,-21 ; -64,-7 62,-7 ; -62,-33 -60,-33 ; -62,-31 -60,-31 ; -62,-29 -58,-29 ; -62,-27 -58,-27 ; -62,-23 24,-23 ; -62,-9 60,-9 ; -62,1 66,1 ; -62,3 62,3 ; -62,5 40,5 ; -62,11 54,11 ; -60,-11 58,-11 ; -60,-1 66,-1 ; -60,13 -58,13 ; -58,-45 40,-45 ; -58,-43 40,-43 ; -58,-41 46,-41 ; -58,-39 42,-39 ; -58,-37 40,-37 ; -58,-35 40,-35 ; -58,-33 14,-33 ; -58,-15 54,-15 ; -58,-13 56,-13 ; -56,-31 16,-31 ; -56,-29 20,-29 ; -56,-17 54,-17 ; -56,13 44,13 ; -56,47 22,47 ; -56,49 -6,49 ; -54,-49 -44,-49 ; -54,-47 -30,-47 ; -54,-27 20,-27 ; -54,-25 22,-25 ; -54,-19 26,-19 ; -54,51 -8,51 ; -52,-55 -32,-55 ; -52,45 12,45 ; -52,53 -10,53 ; -48,55 -14,55 ; -46,43 4,43 ; -44,15 38,15 ; -44,23 30,23 ; -44,41 4,41 ; -44,57 -16,57 ; -42,-53 -26,-53 ; -42,17 58,17 ; -42,19 32,19 ; -42,21 32,21 ; -42,25 28,25 ; -42,27 28,27 ; -42,29 26,29 ; -42,31 18,31 ; -42,33 16,33 ; -42,35 14,35 ; -42,37 14,37 ; -42,39 16,39 ; -38,59 -20,59 ; -34,-51 -14,-51 ; -24,-49 -18,-49 ; -22,-53 -10,-53 ; -22,-47 -18,-47 ; -18,-55 -6,-55 ; -16,-57 -2,-57 ; -14,-47 40,-47 ; -12,-59 2,-59 ; -12,-49 40,-49 ; -8,-61 4,-61 ; -8,-51 38,-51 ; -4,-53 38,-53 ; -4,49 60,49 ; -2,-63 10,-63 ; -2,51 58,51 ; 0,-55 38,-55 ; 0,53 56,53 ; 4,-65 16,-65 ; 4,-57 36,-57 ; 4,55 50,55 ; 6,-67 22,-67 ; 6,57 44,57 ; 8,-61 10,-61 ; 8,-59 36,-59 ; 8,41 28,41 ; 10,59 40,59 ; 12,-61 28,-61 ; 12,43 26,43 ; 12,61 38,61 ; 14,-69 30,-69 ; 14,45 24,45 ; 14,63 36,63 ; 16,-33 48,-33 ; 16,65 34,65 ; 18,-71 38,-71 ; 18,-63 28,-63 ; 18,-31 42,-31 ; 20,31 24,31 ; 20,33 22,33 ; 22,-29 42,-29 ; 22,39 32,39 ; 22,67 30,67 ; 24,-65 26,-65 ; 24,-27 54,-27 ; 24,37 30,37 ; 26,-73 36,-73 ; 26,-25 46,-25 ; 26,-23 48,-23 ; 26,35 66,35 ; 26,47 62,47 ; 28,-21 50,-21 ; 28,-19 52,-19 ; 28,33 66,33 ; 30,29 62,29 ; 30,31 64,31 ; 30,45 64,45 ; 32,-61 36,-61 ; 32,27 62,27 ; 32,67 34,67 ; 34,-69 38,-69 ; 34,23 58,23 ; 34,25 60,25 ; 34,37 36,37 ; 34,43 64,43 ; 36,-67 40,-67 ; 36,-65 42,-65 ; 36,19 52,19 ; 36,21 54,21 ; 36,41 62,41 ; 38,-63 42,-63 ; 38,37 66,37 ; 38,39 64,39 ; 40,-61 44,-61 ; 40,-59 48,-59 ; 40,-57 46,-57 ; 42,-55 46,-55 ; 42,-53 46,-53 ; 42,-51 46,-51 ; 42,-43 48,-43 ; 44,-49 48,-49 ; 44,-47 48,-47 ; 44,-45 48,-45 ; 44,5 64,5 ; 44,7 64,7 ; 46,-35 48,-35 ; 46,-31 50,-31 ; 46,-29 52,-29 ; 50,-25 56,-25 ; 50,15 64,15 ; 52,-23 58,-23 ; 54,-21 60,-21 ; 56,-19 62,-19 ; 58,-17 64,-17 ; 58,13 68,13 ; 60,-15 64,-15 ; 62,-13 66,-13 ; 62,11 72,11 ; 64,-11 68,-11 ; 64,-9 70,-9 ; 66,-7 70,-7 ; 66,9 76,9 ; 68,-5 72,-5 ; 68,-3 74,-3 ; 70,-1 74,-1 ; 70,7 78,7 ; 72,1 76,1 ; 72,3 76,3 ; 72,5 78,5

## Via types
v1: diameter 140, hole 140, Top Layer to Bottom Layer, tented both sides, 1 vias

## Nets (pads, with @x,y where several pads share a name; then routed paths per layer and width w, separated by ;. In a path a pad name is that pad's centre, name@x,y a point inside that pad or via, vN(x,y) a via of type N, cw(c..) or ccw(c..) an arc to the next point about the centre after c; other vN are vias at no path point)
copper on no net:
  other v1: 3136,1920

## Keep-outs
Keep-Out Layer:
  lines w12: -0.2,1999.8 cw(c125,1999.8) 125,2125 3245,2125 ; 0,2000 0,125 ccw(c125.2,125) 125.2,-0.2 ; 125.2,0 3245,0 ccw(c3245,125.2) 3370.2,125.2 ; 3244.8,2125.2 cw(c3244.8,2000) 3370,2000 3370,125

## Other copper
Top Layer:
  text "NO.440637225" at 2111.4,149.89 h200
Bottom Layer:
  text "Kelee" at 1688.46,1604.15 h500

## Silkscreen, mask and mechanical layers (free items; w line width, h text height)
Bottom Overlay:
  region: 3315,442 3315,46 1721,46 1721,442 0,442 0,99.8 ccw(c100,99.8) 100,-0.2 3245,-0.2 3270,0 ccw(c3270,100) 3370,100 3370,442
  text "你是最罕见的一类冒险家!" at 1524.94,1466.17 h120
  text "你是唯一一个勇闯海洋," at 1470.11,1344.73 h120
  text "找回鸦尾公司失落宝藏的人" at 1564.21,1220.17 h120
  text "为了纪念你的努力," at 1363.51,1102.51 h120
  text "我们将赠与你闻名天下的" at 1524.94,979.17 h120
  text "\"冒险大师公会\"终身会员资格" at 1610.04,862.17 h120
  text "感谢你坚定不移的支持!" at 1524.94,741.17 h120
  text "卡斯帕•克雷夫特上" at 1524.94,604.17 h120
  text "《劫掠者文学评论》" at 1524.94,477.17 h120
  text "440637225" at 3320,42 h120
Bottom Solder:
  text "Kelee" at 1688.46,1604.15 h500